# Altium PCB WheatstoneBridhe.PcbDoc
Units mm, origin at the board's own origin, x right, y up, seen from the top; angles counter-clockwise.
Board outline 50.16 x 63.5 mm, 2 copper layers (Top Layer, Bottom Layer); 65 components, 53 nets, 219 pads, 0 vias.
Unrouted connection lines stored in the file: 146.
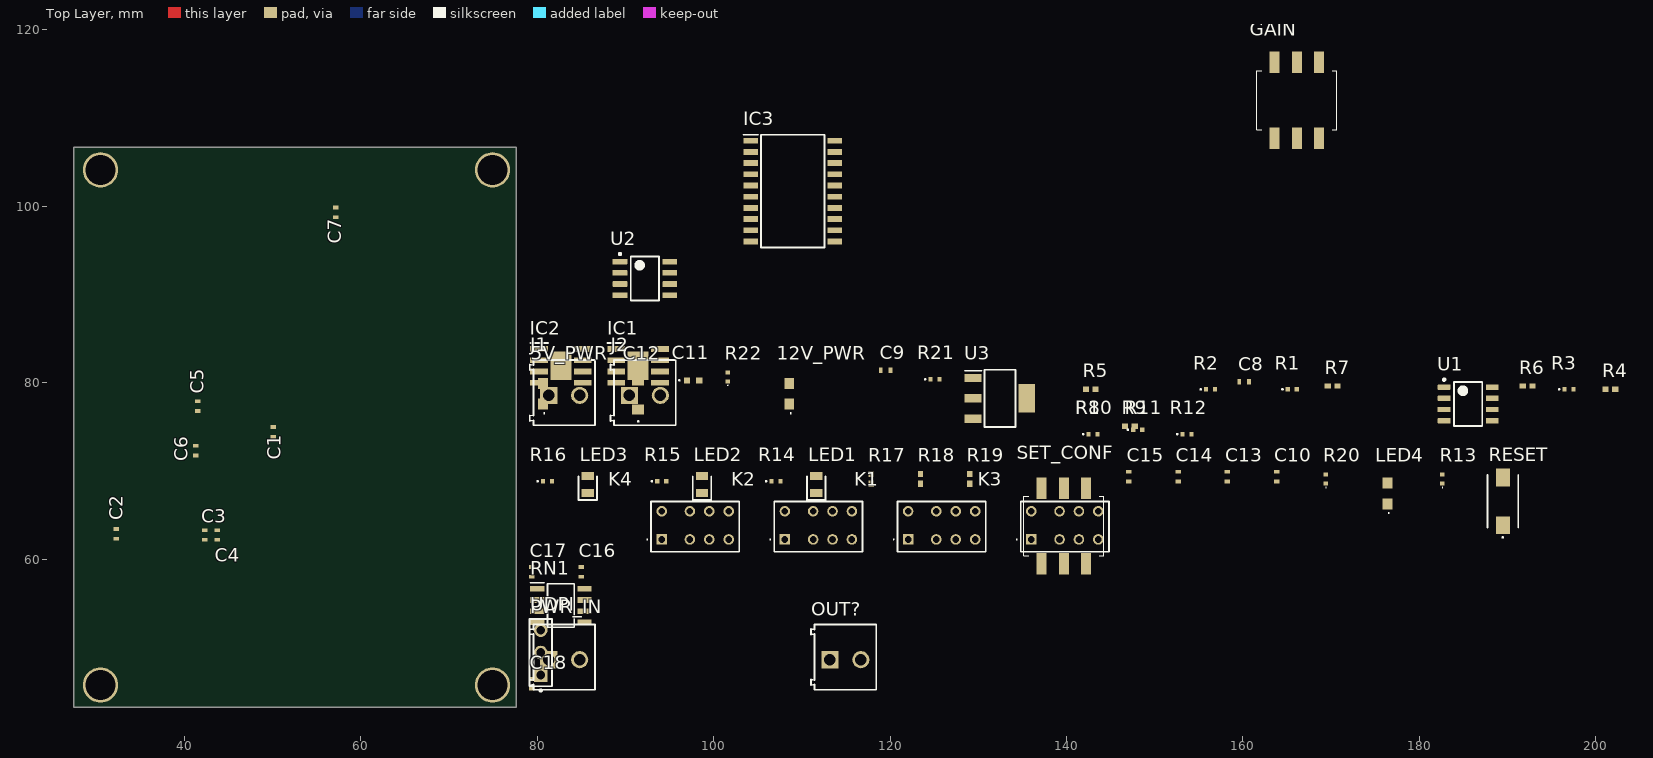
[diagram p0: Top Layer view]
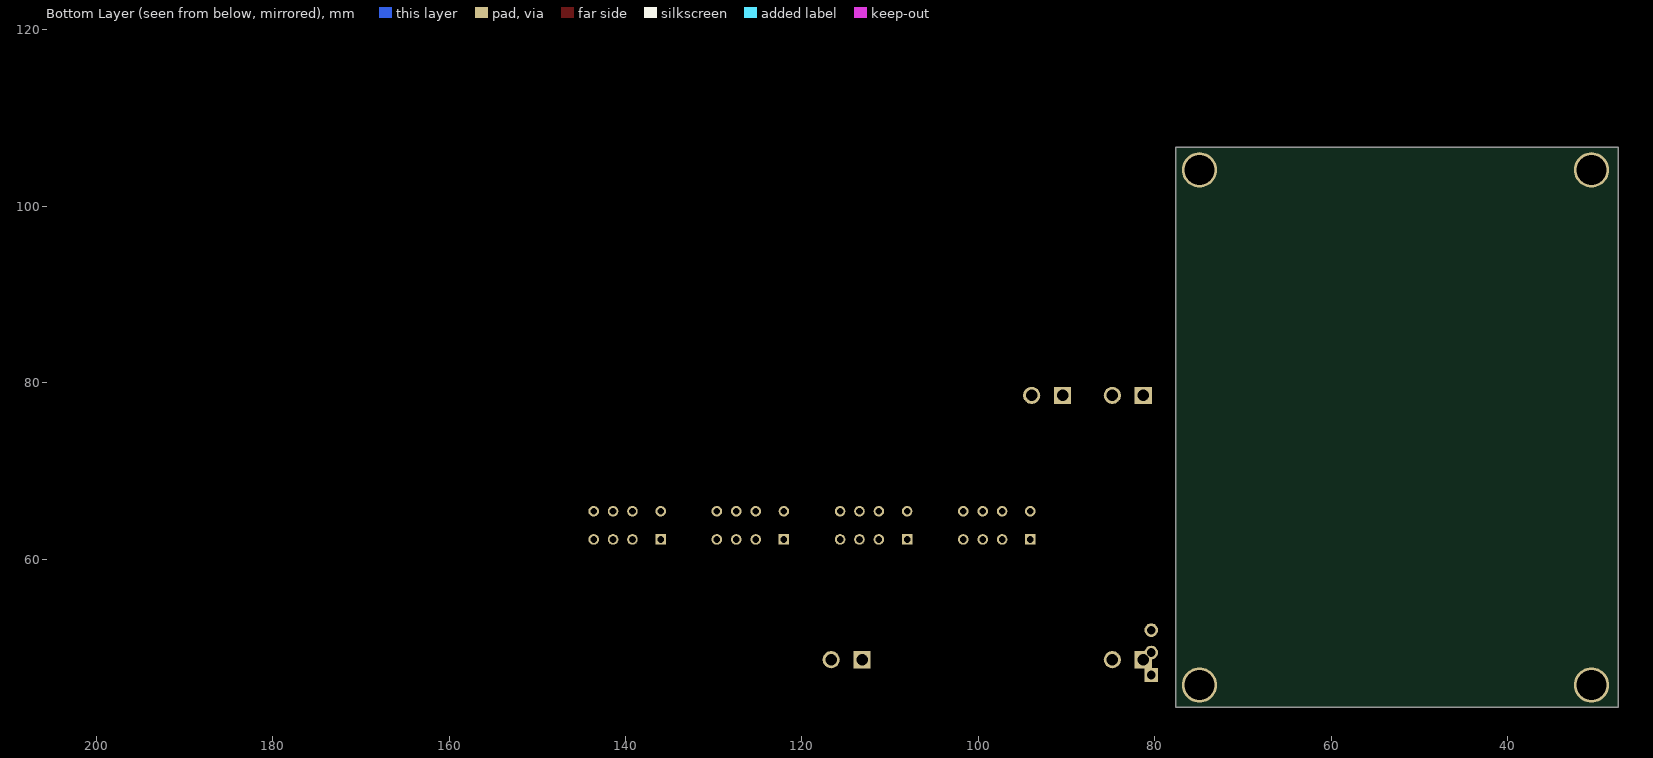
[diagram p1: Bottom Layer view, seen from below]

## Layer stack, top to bottom
Top Solder: solder mask 0.0102, Solder Resist, Dk 3.5
Top Layer: signal copper 0.0356
Dielectric 1: dielectric 0.32, FR-4, Dk 4.8
Bottom Layer: signal copper 0.0356
Bottom Solder: solder mask 0.0102, Solder Resist, Dk 3.5

## Board outline
27.432,43.18 77.597,43.18 77.597,106.68 27.432,106.68

## Design rules (kind name [scope] priority, off if disabled: settings)
Clearance [All] p1: gap=0.254 ignorepadtopadclearanceinfootprint=FALSE except(0: Arc-Hole Track-Hole SMDPad-Hole THPad-Hole Via-Hole Fill-Hole Poly-Hole Region-Hole Text-Hole)
ComponentClearance ComponentClearance_terminals [InComponent('J2') vs InComponent('J3')] p1: gap=0 collisioncheckmode=3 verticalgap=0 showdistances=FALSE // input terminal blocks
PolygonConnect [All] p1: connectstyle=Relief reliefconductorwidth=0.254 reliefentries=4 polygonreliefangle="90 Angle" airgapwidth=0.254
RoomDefinition U_Connectors [InComponentClass('U_Connectors')] p1: confinementstyle=ConfineIn formatcopy=TRUE lockcomponents=FALSE outline 0,0 50.8,0 50.8,25.4 0,25.4
RoomDefinition "U_Bridge & Switching" [InComponentClass('U_Bridge & Switching')] p2: confinementstyle=ConfineIn formatcopy=TRUE lockcomponents=FALSE outline 0,0 50.8,0 50.8,25.4 0,25.4
RoomDefinition U_Amplifier [InComponentClass('U_Amplifier')] p3: confinementstyle=ConfineIn formatcopy=TRUE lockcomponents=FALSE outline 0,0 50.8,0 50.8,25.4 0,25.4
RoomDefinition "U_Relay Control" [InComponentClass('U_Relay Control')] p4: confinementstyle=ConfineIn formatcopy=TRUE lockcomponents=FALSE outline 78.74,61.468 95.377,61.468 95.377,87.376 78.74,87.376
RoomDefinition U_MCU [InComponentClass('U_MCU')] p5: confinementstyle=ConfineIn formatcopy=TRUE lockcomponents=FALSE outline 78.74,61.468 95.377,61.468 95.377,87.376 78.74,87.376
RoomDefinition U_PSU [InComponentClass('U_PSU')] p6: confinementstyle=ConfineIn formatcopy=TRUE lockcomponents=FALSE outline 78.74,46.863 127.635,46.863 127.635,97.536 78.74,97.536
RoutingVias [All] p1: holewidth=0.711 width=1.27 viastyle="Through Hole" minholewidth=0.711 minwidth=1.27 maxholewidth=0.711 maxwidth=1.27
SolderMaskExpansion [All] p1: expansion=0.102 istentingtop=FALSE
Width [All] p1: maxlimit=0.254 minlimit=0.254 preferedwidth=0.254
29 further rules are at their usual default settings.

## Classes and differential pairs
component class "U_Relay Control": C16 C17 IC1 IC2
component class U_PSU: 5V_PWR 12V_PWR C1 C2 C3 C4 C5 C6 C7 C9 C11 C12 C18 R21 R22 U2 U3
component class U_MCU: C10 C13 C14 C15 IC3 LED1 LED2 LED3 LED4 R13 R14 R15 R16 R17 R18 R19 R20 RESET SET_CONF
component class U_Connectors: J1 J2 OUT? PWR_IN UDPI
component class U_Amplifier: C8 GAIN R1 R2 R3 R4 R5 R6 R7 R8 R9 R10 R11 R12 U1
component class "U_Bridge & Switching": K1 K2 K3 K4 RN1

## Components (designator, comment, footprint, x,y, rotation, side; value= is the part's Value field where it differs from the comment)
5V_PWR "Red" APT2012SECKJ3PRV 80.645,78.74 r90 top
12V_PWR "Red" APT2012SECKJ3PRV 108.585,78.74 r90 top
C1 "1uF" CAPC1005X55N 50.038,74.422 r90 top
C2 "1uF" CAPC1005X55N 32.258,62.865 r270 top
C3 "100nF" CAPC1005X55N 42.291,62.738 r270 top
C4 "100nF" CAPC1005X55N 43.688,62.738 r270 top
C5 "100nF" CAPC1005X55N 41.529,77.343 r90 top
C6 "100nF" CAPC1005X55N 41.275,72.305 r90 top
C7 "100nF" CAPC1005X55N 57.15,99.314 r270 top
C8 "1nF C0G" CAPC1005X55N 160.147,80.137 r0 top
C9 "1uF" CAPC1005X55N 119.507,81.407 r0 top
C10 "100nF" CAPC1005X55N 163.83,69.342 r90 top
C11 "10uF" C1608_Commercial 97.663,80.264 r0 top
C12 "22uF" C3216_Commercial 91.44,78.613 r90 top
C13 "1uF" CAPC1005X55N 158.242,69.342 r90 top
C14 "100nF" CAPC1005X55N 152.654,69.342 r90 top
C15 "1nF" CAPC1005X55N 147.066,69.342 r90 top
C16 "100nF" CAPC1005X55N 84.963,58.547 r90 top
C17 "100nF" CAPC1005X55N 79.375,58.547 r90 top
C18 "100nF" CAPC1005X55N 79.375,45.847 r90 top
GAIN "DIP SWITCH" 2193LPSTR 166.116,112.014 r0 top
IC1 "TB67H451FNG,EL" SOIC127P600X170-9N 91.44,81.915 r0 top
IC2 "TB67H451FNG,EL" SOIC127P600X170-9N 82.677,81.915 r0 top
IC3 "ATTINY1626-SF" SOIC127P1030X265-20N 108.966,101.727 r0 top
J1 "691214110002" 691214110002 83.058,78.867 r0 top
J2 "691214110002" 691214110002 92.202,78.867 r0 top
K1 "2-1462038-1" 214620381 122.047,62.23 r0 top
K2 "2-1462038-1" 214620381 108.077,62.23 r0 top
K3 "2-1462038-1" 214620381 136.017,62.23 r0 top
K4 "2-1462038-1" 214620381 94.107,62.23 r0 top
LED1 "Blue" LEDC2012X85N 111.633,68.453 r90 top
LED2 "Blue" LEDC2012X85N 98.679,68.453 r90 top
LED3 "Blue" LEDC2012X85N 85.725,68.453 r90 top
LED4 "Red" APT2012SECKJ3PRV 176.403,67.437 r90 top
OUT? "691214110002" 691214110002 114.935,48.895 r0 top
PWR_IN "691214110002" 691214110002 83.058,48.895 r0 top
R1 "1k" ERA2V_(0402) 165.608,79.248 r0 top
R2 "1k" ERA2V_(0402) 156.337,79.248 r0 top
R3 "1k" ERA2V_(0402) 196.977,79.248 r0 top
R4 "150k" RESC1005X35N 201.676,79.248 r0 top
R5 "150k" RESC1005X35N 142.748,79.248 r0 top
R6 "18k" RESC1005X35N 192.278,79.629 r0 top
R7 "18k" RESC1005X35N 170.18,79.629 r0 top
R8 "1k" ERA2V_(0402) 143.002,74.168 r0 top
R9 "18k" RESC1005X35N 147.193,75.057 r0 top
R10 "1k" ERA2V_(0402) 143.002,74.168 r0 top
R11 "47k" ERA2A_(0402) 148.082,74.676 r0 top
R12 "1k" ERA2V_(0402) 153.67,74.168 r0 top
R13 "330R" ERJ2RKD1004X 182.626,69.088 r90 top
R14 "1k" ERA2V_(0402) 107.061,68.834 r0 top
R15 "1k" ERA2V_(0402) 94.107,68.834 r0 top
R16 "1k" ERA2V_(0402) 81.153,68.834 r0 top
R17 "18k" RESC1005X35N 117.856,69.088 r90 top
R18 "18k" RESC1005X35N 123.444,69.088 r90 top
R19 "18k" RESC1005X35N 129.032,69.088 r90 top
R20 "330R" ERJ2RKD1004X 169.418,69.088 r90 top
R21 "1k" ERA2V_(0402) 125.095,80.391 r0 top
R22 "330R" ERJ2RKD1004X 101.6,80.645 r90 top
RESET "SW1" 95C04A3GWRT 189.484,66.548 r90 top
RN1 "ORNTA1001BT1" SOIC127P607X173-8N 82.677,54.737 r0 top
SET_CONF "DIP SWITCH" 2193LPSTR 139.7,63.754 r0 top
U1 "LMC6482IM/NOPB" D0008A_N 185.547,77.597 r0 top
U2 "TL750L10CD" D0008A_M 92.202,91.821 r0 top
U3 "AZ1117H-5.0TRG1" SOT230P700X180-4N 132.461,78.232 r0 top
UDPI "90120-0123" FP-90120-0123-MFG 80.391,49.403 r90 top

## Footprints (in the part's own frame and the unit in brackets; to place one, negate y for a bottom-side part, rotate by r counter-clockwise, add the part's x,y. Pads: shape width x height; smd on the part's side, far side on the other; paste and mask are expansions set on the pad)
95C04A3GWRT [mm]
  rect 2x1.6 smd: 1(-2.7,0) 2(2.7,0)
  silkscreen extent -4.13,-1.75 3,1.75
2193LPSTR [mm]
  rect 1.13x2.44 smd: 1(-2.54,-4.305) 2(0,-4.305) 3(2.54,-4.305) 4(2.54,4.305) 5(0,4.305) 6(-2.54,4.305)
  silkscreen extent -4.54,-3.35 4.54,3.35, body extent -4.54,-5.41 4.54,5.41, height 4.05
214620381 [mm]
  rect 1.2x1.2 hole 0.75: 1(0,0)
  round 1.2 hole 0.75: 2(3.2,0) 3(5.4,0) 4(7.6,0) 5(7.6,3.2) 6(5.4,3.2) 7(3.2,3.2) 8(0,3.2)
  silkscreen extent -1.7,-1.4 8.8,4.3, body extent -1.2,-1.27 8.8,4.43, height 5.7
691214110002 [mm] "3.50 mm Horizontal Entry Modular, 2p"
  rect 1.95x1.95 hole 1.3: 1(-1.75,-0.3)
  round 1.95 hole 1.3: 2(1.75,-0.3)
  silkscreen extent -3.9,-3.7 3.5,3.7, body extent -3.95,-3.7 3.5,3.7, height 8.55
APT2012SECKJ3PRV [mm]
  rect 1.25x1.1 smd: 1(-1.175,0) 2(1.175,0)
  silkscreen extent -2.25,-0.2 -2.15,-0.1, body extent -1,-0.63 1,0.63, height 0.85
C1608_Commercial [mm]
  rect 0.7x0.7 smd: 1(-0.7,0) 2(0.7,0)
  silkscreen extent -1.6,-0.05 -1.5,0.05, body extent -0.8,-0.4 0.8,0.4, height 0.8
C3216_Commercial [mm]
  rect 1.1x1.35 smd: 1(-1.65,0) 2(1.65,0)
  silkscreen extent -3.05,-0.05 -2.95,0.05, body extent -1.65,-0.8 1.55,0.8, height 1.6
CAPC1005X55N [mm]
  rect 0.42x0.62 smd: 1(-0.55,0) 2(0.55,0)
  body extent -0.5,-0.25 0.5,0.25, height 0.55
D0008A_M [mm] "SOIC, 8-Leads, Body 5x4mm, Pitch 1.27mm, IPC Low Density"
  rrect15% 1.65x0.65 smd: 1(-2.825,1.905) 2(-2.825,0.635) 3(-2.825,-0.635) 4(-2.825,-1.905) 5(2.825,-1.905) 6(2.825,-0.635) 7(2.825,0.635) 8(2.825,1.905)
  silkscreen extent -2.95,-2.5 1.6,2.9, body extent -3,-2.45 3,2.45, height 1.63
D0008A_N [mm] "SOIC, 8-Leads, Body 5x4mm, Pitch 1.27mm, IPC Medium Density"
  rrect17% 1.45x0.6 smd: 1(-2.725,1.905) 2(-2.725,0.635) 3(-2.725,-0.635) 4(-2.725,-1.905) 5(2.725,-1.905) 6(2.725,-0.635) 7(2.725,0.635) 8(2.725,1.905)
  silkscreen extent -2.85,-2.5 1.6,2.88, body extent -3,-2.45 3,2.45, height 1.63
ERA2A_(0402) [mm]
  rect 0.475x0.5 smd: 1(-0.513,0) 2(0.513,0)
  silkscreen extent -1.16,-0.05 -1.06,0.05, body extent -0.5,-0.25 0.5,0.25, height 0.35
ERA2V_(0402) [mm]
  rect 0.475x0.5 smd: 1(-0.513,0) 2(0.513,0)
  silkscreen extent -1.16,-0.05 -1.06,0.05, body extent -0.5,-0.25 0.5,0.25, height 0.36
ERJ2RKD1004X [mm]
  rect 0.475x0.5 smd: 1(-0.512,0) 2(0.512,0)
  silkscreen extent -0.97,-0.03 -0.93,0.03, body extent -0.5,-0.25 0.5,0.25, height 0.35
FP-90120-0123-MFG [mm]
  rect 1.55x1.55 hole 1 paste-1000 mask+0: 1(-2.54,0)
  round 1.55 hole 1 paste-1000 mask+0: 2(0,0) 3(2.54,0)
  silkscreen extent -4.42,-1.27 3.81,1.27, body extent -3.91,-1.37 3.91,1.37, height 0.25
LEDC2012X85N [mm]
  rect 0.9x1.4 smd: 1(-0.95,0) 2(0.95,0)
  silkscreen extent -1.75,-1.05 0.95,1.05, body extent -1.05,-0.63 0.99,0.63, height 0.77
RESC1005X35N [mm]
  rect 0.7x0.6 smd: 1(-0.55,0) 2(0.55,0)
  body extent -0.5,-0.25 0.5,0.25, height 0.35
SOIC127P600X170-9N [mm]
  rect 2x0.65 smd: 1(-2.475,1.905) 2(-2.475,0.635) 3(-2.475,-0.635) 4(-2.475,-1.905) 5(2.475,-1.905) 6(2.475,-0.635) 7(2.475,0.635) 8(2.475,1.905)
  rect 2.39x3.2 smd: 9(0,0)
  silkscreen extent -3.47,2.58 -1.48,2.58, body extent -3,-2.45 3,2.45, height 1.7
SOIC127P607X173-8N [mm]
  rect 1.6x0.65 smd: 1(-2.675,1.905) 2(-2.675,0.635) 3(-2.675,-0.635) 4(-2.675,-1.905) 5(2.675,-1.905) 6(2.675,-0.635) 7(2.675,0.635) 8(2.675,1.905)
  silkscreen extent -3.47,-2.46 1.53,2.58, body extent -3.04,-2.46 3.04,2.46, height 1.73
SOIC127P1030X265-20N [mm]
  rect 1.65x0.65 smd: 1(-4.775,5.715) 2(-4.775,4.445) 3(-4.775,3.175) 4(-4.775,1.905) 5(-4.775,0.635) 6(-4.775,-0.635) 7(-4.775,-1.905) 8(-4.775,-3.175) 9(-4.775,-4.445) 10(-4.775,-5.715) 11(4.775,-5.715) 12(4.775,-4.445) 13(4.775,-3.175) 14(4.775,-1.905) 15(4.775,-0.635) 16(4.775,0.635) 17(4.775,1.905) 18(4.775,3.175) 19(4.775,4.445) 20(4.775,5.715)
  silkscreen extent -5.6,-6.4 3.6,6.4, body extent -5.15,-6.4 5.15,6.4, height 2.65
SOT230P700X180-4N [mm]
  rect 1.9x0.95 smd: 1(-3.05,2.3) 2(-3.05,0) 3(-3.05,-2.3)
  rect 1.9x3.2 smd: 4(3.05,0)
  silkscreen extent -4,-3.25 1.75,3.25, body extent -3.5,-3.25 3.5,3.25, height 1.8

## Part data
5V_PWR 12V_PWR LED4: library part APT2012SECK_J3-PRV, "LED", Manufacturer_Name=Kingbright, Manufacturer_Part_Number=APT2012SECK/J3-PRV, Datasheet Link=https://www.mouser.de/datasheet/2/216/APT2012SECK-J3-PRV-1173389.pdf, Height=0.85mm
C1 C2 C9 C13: library part GRT155C81E105KE13D, "Capacitor", Manufacturer_Name="Murata Electronics", Datasheet Link=https://psearch.en.murata.com/capacitor/product/GRT155C81E105KE13%23.html, Height=0.55mm, Manufacturer_Part_Number=GRT155C81E105KE13D
C3 C4 C5 C6 C7 C10 C14 C16 C17 C18: library part GCM155L81E104KE02D, "Capacitor", Manufacturer_Name="Murata Electronics", Datasheet Link=https://psearch.en.murata.com/capacitor/product/GCM155L81E104KE02%23.html, Height=0.55mm, Manufacturer_Part_Number=GCM155L81E104KE02D
C8 C15: library part CGA2B2C0G1H102J050BE, "Capacitor", Manufacturer_Name=TDK, Datasheet Link=https://product.tdk.com/system/files/dam/doc/product/capacitor/ceramic/mlcc/catalog/mlcc_automotive_soft_en.pdf, Height=0.55mm, Manufacturer_Part_Number=CGA2B2C0G1H102J050BE
C11: library part C1608JB1E106M080AC, "Capacitor", Manufacturer_Name=TDK, Datasheet Link=https://product.tdk.com/system/files/dam/doc/product/capacitor/ceramic/mlcc/catalog/mlcc_commercial_general_en.pdf, Height=0.9mm, Manufacturer_Part_Number=C1608JB1E106M080AC
C12: library part C3216X6S1E226M160AC, "Capacitor", Manufacturer_Name=TDK, Datasheet Link=https://product.tdk.com/system/files/dam/doc/product/capacitor/ceramic/mlcc/catalog/mlcc_commercial_general_en.pdf, Height=0.75mm, Manufacturer_Part_Number=C3216X6S1E226M160AC
GAIN SET_CONF: library part 219-3LPSTR, "Switch", Manufacturer_Name=CTS, Datasheet Link=https://www.ctscorp.com/wp-content/uploads/219.pdf, Height=3.95mm, Manufacturer_Part_Number=219-3LPSTR
IC1 IC2: "Integrated Circuit", Manufacturer_Name=Toshiba, Datasheet Link=https://www.mouser.it/datasheet/2/408/TB67H451FNG_datasheet_en_20191111-1713881.pdf, Height=1.7mm, Manufacturer_Part_Number=TB67H451FNG,EL
IC3: "Integrated Circuit", Manufacturer_Name=Microchip, Datasheet Link=https://ww1.microchip.com/downloads/aemDocuments/documents/MCU08/ProductDocuments/DataSheets/ATtiny1624-26-27-DataSheet-DS40002234B.pdf, Height=2.65mm, Manufacturer_Part_Number=ATTINY1626-SF
J1 J2 OUT? PWR_IN: library part CMP-1502-02464-1, "Serie 2141 - 3.50 mm Horizontal Entry Modular with Rising Cage Clamp WR-TBL, 2 pin", Manufacturer="Wurth Elektronik", Operating Temperature=-40to105degC, Datasheet URL=http://katalog.we-online.de/em/datasheet/6912141100xx.pdf, Manufacturer URL=http://www.we-online.de, Mounting Technology=THT, Package Reference=691214110002, Packaging=Box, Part Number=691214110002, Pin Number=2, Pitch=3.50mm, Publisher=WurthElektronik
K1 K2 K3 K4: "Relay or Contactor", Manufacturer_Name="TE Connectivity", Datasheet Link=https://www.te.com/commerce/DocumentDelivery/DDEController?Action=srchrtrv&DocNm=108-98001&DocType=Data+Sheet&DocLang=English&PartCntxt=2-1462038-1&DocFormat=pdf, Height=5.8mm, Manufacturer_Part_Number=2-1462038-1
LED1 LED2 LED3: library part APT2012LVBC_D, "LED", Manufacturer_Name=Kingbright, Manufacturer_Part_Number=APT2012LVBC/D, Mouser2 Part Number=604-APT2012LVBCD, Datasheet Link=https://componentsearchengine.com//APT2012LVBC_D.pdf, Height=0.85mm, Mouser2 Price/Stock=https://www.mouser.com/Search/Refine.aspx?Keyword=604-APT2012LVBCD
R1 R2 R3 R8 R10 R12 R14 R15 R16 R21: library part ERA-2VEB1001X, "Resistor", Manufacturer_Name=Panasonic, Datasheet Link=http://industrial.panasonic.com/cdbs/www-data/pdf/RDM0000/RDM0000C331.pdf, Height=0.4mm, Manufacturer_Part_Number=ERA-2VEB1001X
R4 R5: library part CPF0402B150KE1, "Resistor", Manufacturer_Name="TE Connectivity", Height=0.35mm, Manufacturer_Part_Number=CPF0402B150KE1
R6 R7 R9 R17 R18 R19: library part CPF0402B18KE1, "Resistor", Manufacturer_Name="TE Connectivity", Height=0.35mm, Manufacturer_Part_Number=CPF0402B18KE1
R11: library part ERA-2APB473X, "Resistor", Manufacturer_Name=Panasonic, Datasheet Link=http://industrial.panasonic.com/cdbs/www-data/pdf/RDM0000/AOA0000C307.pdf, Height=0.4mm, Manufacturer_Part_Number=ERA-2APB473X
R13 R20 R22: library part ERJ-2RHD3300X, "Resistor", Manufacturer_Name=Panasonic, Datasheet Link=https://datasheet.datasheetarchive.com/originals/distributors/DKDS41/DSANUWW0038499.pdf, Height=0.4mm, Manufacturer_Part_Number=ERJ-2RHD3300X
RESET: library part 95C04A3GWRT, "Switch", Manufacturer_Name=Grayhill, Mouser2 Part Number=706-95C04A3GWRT, Datasheet Link=https://componentsearchengine.com//95C04A3GWRT.pdf, Manufacturer_Part_Number=95C04A3GWRT, Mouser2 Price/Stock=https://www.mouser.com/Search/Refine.aspx?Keyword=706-95C04A3GWRT
RN1: "Resistor Network", Manufacturer_Name=Vishay, Mouser Part Number=71-ORNTA1001BT1, Datasheet Link=https://www.vishay.com/docs/60005/orn.pdf, Height=1.73mm, Manufacturer_Part_Number=ORNTA1001BT1, Mouser Price/Stock=https://www.mouser.co.uk/ProductDetail/Vishay-Thin-Film/ORNTA1001BT1?qs=EiQZnNXpF8A9ZYJTqcYggA%3D%3D
U1: library part CMP-0055-00847-3, "CMOS Dual Rail-to-Rail Input and Output Operational Amplifier, 8-pin Narrow SOIC, Pb-Free", Manufacturer="Texas Instruments", Package Reference=D0008A, PackageTopMarking=NSZXTT*LMC64*82IM, PowerWise=N, Code_IPC=SOIC127P600-8, Code_JEDEC=MS-012-AA, ComponentLink1Description="Datasheet URL", ComponentLink1URL=http://www.ti.com/general/docs/lit/getliterature.tsp?genericPartNumber=LMC6482&fileType=pdf, CompType=Amplifiers, PackageDescription="SOIC Narrow, 4.9 x 3.9 x 1.45mm, 8 Lead, 1.27mm Pitch", PinCount=8, RoHS=Y
U2: library part CMP-0394-00106-2, "Single Output LDO, 150 mA, Fixed 10 V Output, 11 to 26 V Input, with Low IQ, 8-pin SOIC (D), 0 to 125 degC, Green (RoHS & no Sb/Br)", Manufacturer="Texas Instruments", Rating=Catalog, Accuracy(%)=4, Code_JEDEC=MS-012, ComponentLink1Description="Manufacturer URL", ComponentLink1URL=http://www.ti.com/, ComponentLink2Description=Datasheet, ComponentLink2URL=http://www.ti.com/general/docs/lit/getliterature.tsp?genericPartNumber=TL750L10&fileType=pdf, ComponentLink3Description="Package Specification", ComponentLink3URL=http://www.ti.com/litv/pdf/msoi002j, ComponentLink4Description="URL Link1", ComponentLink4URL="Samples URL:http://www.ti.com/product/tl750l10#samples", DatasheetVersion=SLVS017U, Eco-Plan="Green (RoHS & no Sb/Br)", Fixed Output Options(V)=10, Iout(Max)(A)=0.15, Iq(Typ)(mA)=1, Mounting Technology="Surface Mount", PackageDescription="8-Pin Plastic Small Outline, Body 4.9 x 3.9 mm, Pitch 1.27 mm", PackageReference=D0008A, PackageVersion=4040047-3/M, PartNumber=TL750L10CD, SubFamily="Single Channel LDO", Vdo(Typ)(mV)=600, Vin(Max)(V)=26, Vin(Min)(V)=11, Vout Adj(Max)(V)=10, Vout Adj(Min)(V)=10
U3: "Integrated Circuit", Manufacturer_Name="Diodes Inc.", Datasheet Link=https://media.digikey.com/pdf/Data%20Sheets/Diodes%20PDFs/AZ1117_Rev2.1.pdf, Height=1.8mm, Manufacturer_Part_Number=AZ1117H-5.0TRG1
UDPI: library part CMP-04776-000237-1, "CONN HEADER VERT 3POS 2.54MM", Color=Black, Contact Resistance=20mR, Current Rating=3A, Max Operating Temperature=125°C, Max Voltage Rating (DC)=350.35kV, Min Operating Temperature=-55°C, Voltage Rating=350V, Contact Gender=Male, Contact Material=Brass, Contact Mating Length=6.75mm, Contact Plating=Tin, Contact Post Length=2.9mm, Gender=Male, Glow Wire Compliant=Non-compliant, Housing Color=Black, Housing Material=Polyester, Lead Free="Lead Free", Mount="Through Hole", Number of Circuits=3, Number of Contacts=3, Number of Positions=3, Number of Rows=1, Orientation=Vertical, Packaging=Tray, Pitch=2.54mm, Radiation Hardening=No, REACH SVHC="No SVHC", RoHS Compliant=Yes, Series=90120, Termination=Solder, Voltage Rating (AC)=350V

## Free pads (board coordinates)
  round 4 hole 3.4: 1(30.48,45.72) 1(30.48,104.14) 1(74.93,45.72) 1(74.93,104.14)

## Nets (pads, with @x,y where several pads share a name; then routed paths per layer and width w, separated by ;. In a path a pad name is that pad's centre, name@x,y a point inside that pad or via, vN(x,y) a via of type N, cw(c..) or ccw(c..) an arc to the next point about the centre after c; other vN are vias at no path point)
+5: C12.2 C13.2 C14.2 C15.2 C18.2 IC1.4 IC2.4 IC3.1 LED1.2 LED2.2 LED3.2 R20.1 R22.2 SET_CONF.4 SET_CONF.5 SET_CONF.6 U3.2 UDPI.1
+10: C2.2 C3.2 C4.2 C5.2 C6.2 C7.2 J1.2 U2.1
+12: C1.2 C9.2 C11.2 PWR_IN.2 R21.1 U2.8 U3.3
AGND: 5V_PWR.2 12V_PWR.2 C1.1 C2.1 C3.1 C4.1 C5.1 C6.1 C7.1 C9.1 C10.1 C11.1 C12.1 C13.1 C14.1 C15.1 C16.1 C17.1 C18.1 IC1.1 IC1.7 IC2.1 IC2.7 IC3.20 J2.1 K2.5 OUT?.2 PWR_IN.1 R3.1 R5.1 R17.1 R18.1 R19.1 RESET.2 RN1.2 RN1.3 U1.4 U2.2 U2.3 U2.6 U2.7 U3.1 UDPI.3
AMP_IN+: C8.1 K3.3 R2.1
AMP_IN-: C8.2 K3.6 R1.1
FULL_BR_N: K1.7 K3.7
FULL_BR_P: K1.2 K3.2
IN+: J1.1 K1.3 K4.2
IN-: J2.2 K1.6
K13_CTRL_1: IC1.2 IC3.15
K13_CTRL_2: IC1.3 IC3.14
K13_N: IC1.8 K1.8 K3.8
K13_P: IC1.6 K1.1 K3.1
K24_CTRL_1: IC2.2 IC3.13
K24_CTRL_2: IC2.3 IC3.12
K24_N: IC2.8 K2.8 K4.8
K24_P: IC2.6 K2.1 K4.1
Net5V_PWR_1: 5V_PWR.1 R22.1
Net12V_PWR_1: 12V_PWR.1 R21.2
NetC10_2: C10.2 R13.2 RESET.1
NetC16_2: C16.2 IC1.5
NetC17_2: C17.2 IC2.5
NetGAIN_1: GAIN.1 R6.2 R7.2
NetGAIN_2: GAIN.2 R9.2
NetGAIN_3: GAIN.3 R12.2
NetIC3_2: IC3.2 LED4.2
NetIC3_6: IC3.6 R19.2 SET_CONF.3
NetIC3_7: IC3.7 R18.2 SET_CONF.2
NetIC3_8: IC3.8 R17.2 SET_CONF.1
NetIC3_9: IC3.9 R16.2
NetIC3_10: IC3.10 R15.2
NetIC3_11: IC3.11 R14.2
NetLED1_1: LED1.1 R14.1
NetLED2_1: LED2.1 R15.1
NetLED3_1: LED3.1 R16.1
NetLED4_1: LED4.1 R20.2
NetR8_2: R8.2 R9.1
NetR10_2: R10.2 R11.1
NetR11_2: R11.2 R12.1
"OP1 -": R1.2 R4.1 U1.6
OP1+: R2.2 R5.2 U1.5
OP1_OUT: R4.2 U1.3 U1.7
OP2-: R3.2 R6.1 R7.1 R8.1 R10.1 U1.2
OUT_P: GAIN.4 GAIN.5 GAIN.6 OUT?.1 U1.1
PART2_BR_N: K3.5 K4.6
PART2_BR_P: K3.4 K4.3
PART_BR_IN_N: K1.5 K2.7
PART_BR_IN_P: K1.4 K2.3
UDPI: IC3.16 R13.1 UDPI.2
WH_A: K2.6 K4.4 RN1.6
WH_B: K4.5 K4.7 RN1.7 RN1.8
WH_VCC: K2.4 RN1.1 U1.8
pads on no net: IC1.9 IC2.9 IC3.3 IC3.4 IC3.5 IC3.17 IC3.18 IC3.19 K2.2 RN1.4 RN1.5 U2.4 U2.5 U3.4